# Altium PCB CDH_PCB.PcbDoc
Units mil, origin at the board's own origin, x right, y up, seen from the top; angles counter-clockwise.
Board outline 4735 x 5440 mil, 4 copper layers (Top Layer, Int1 (GND), Int2 (PWR), Bottom Layer), stack 53.912 mil thick; 100 components, 95 nets, 535 pads, 0 vias.
Unrouted connection lines stored in the file: 290.
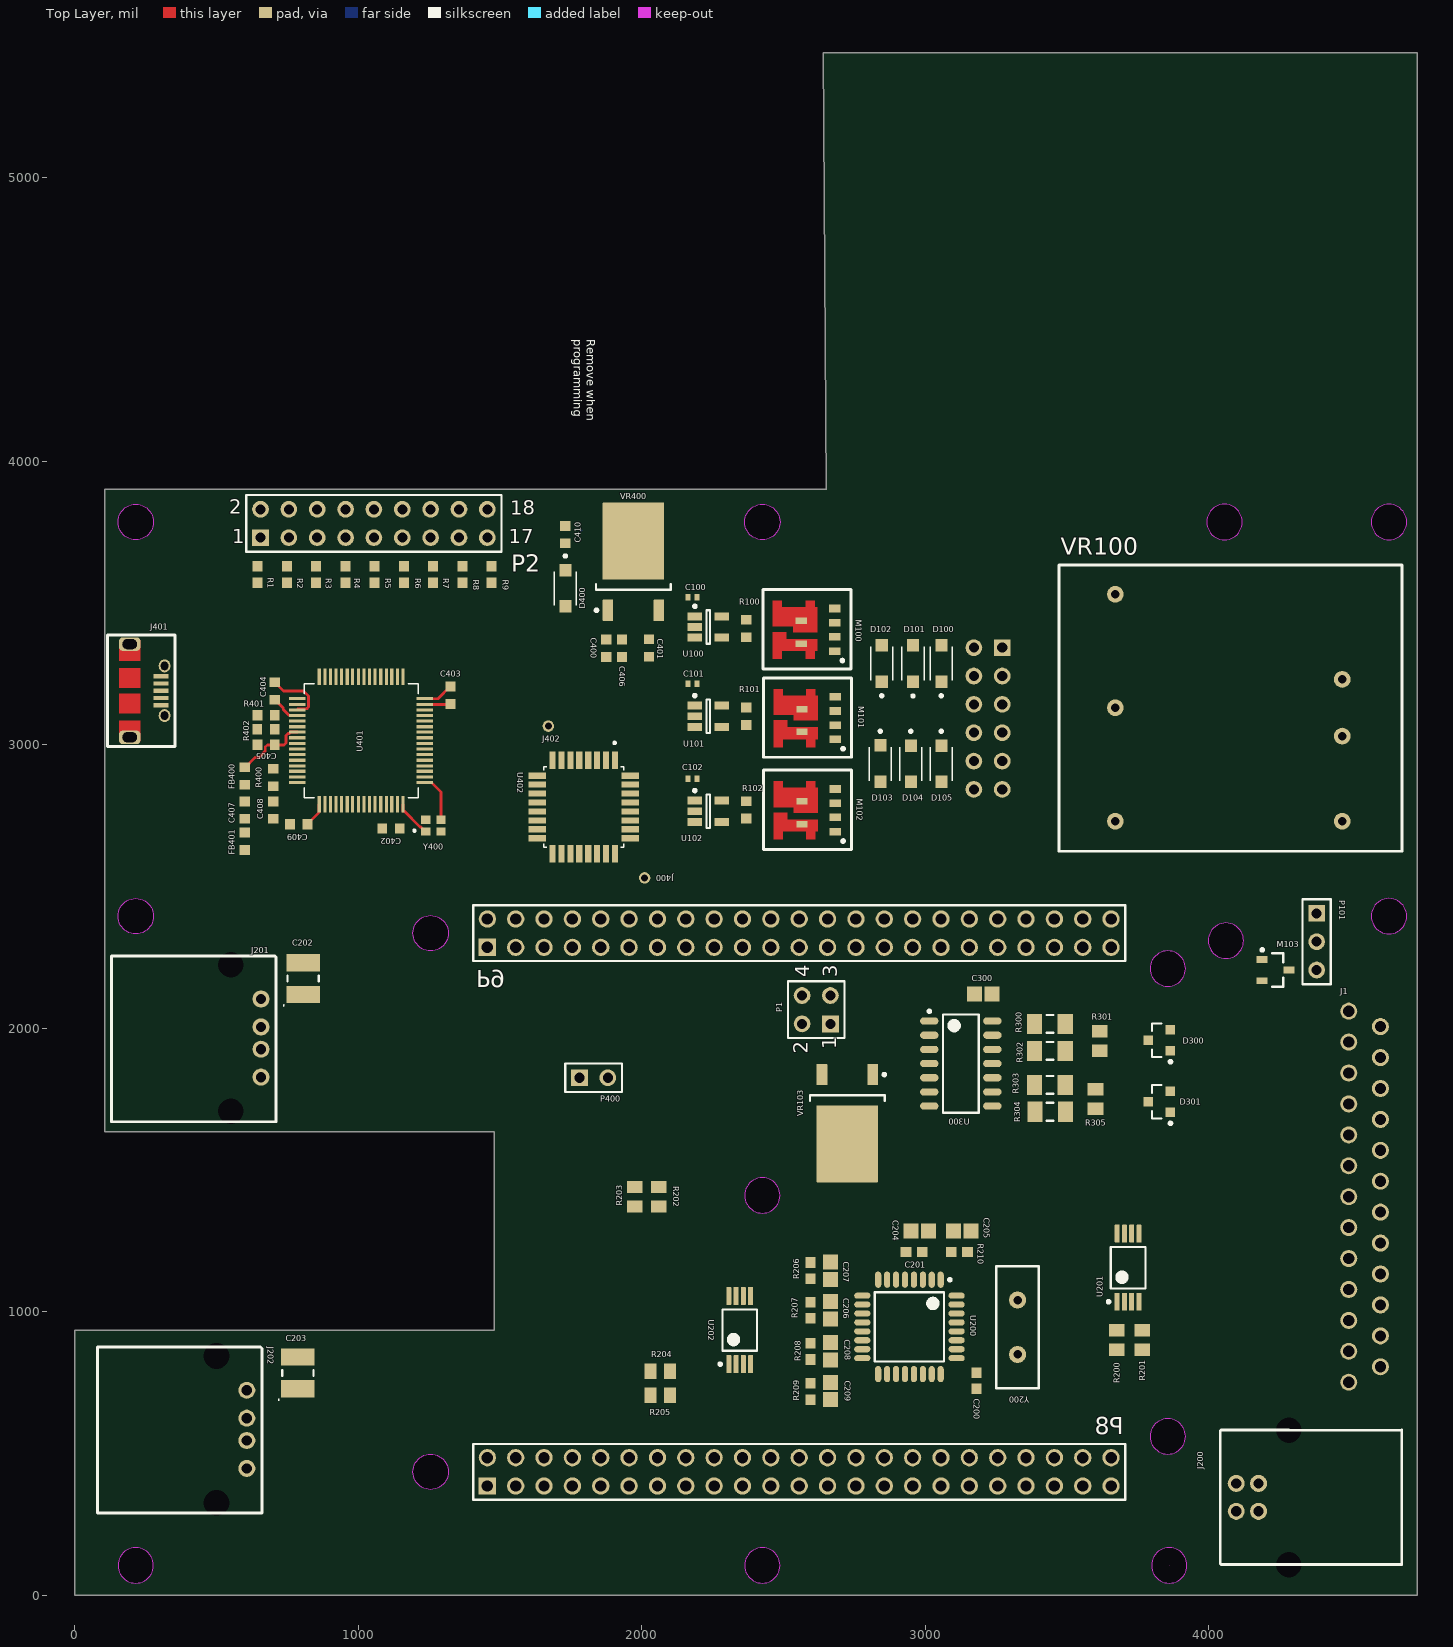
[diagram p0: Top Layer view]
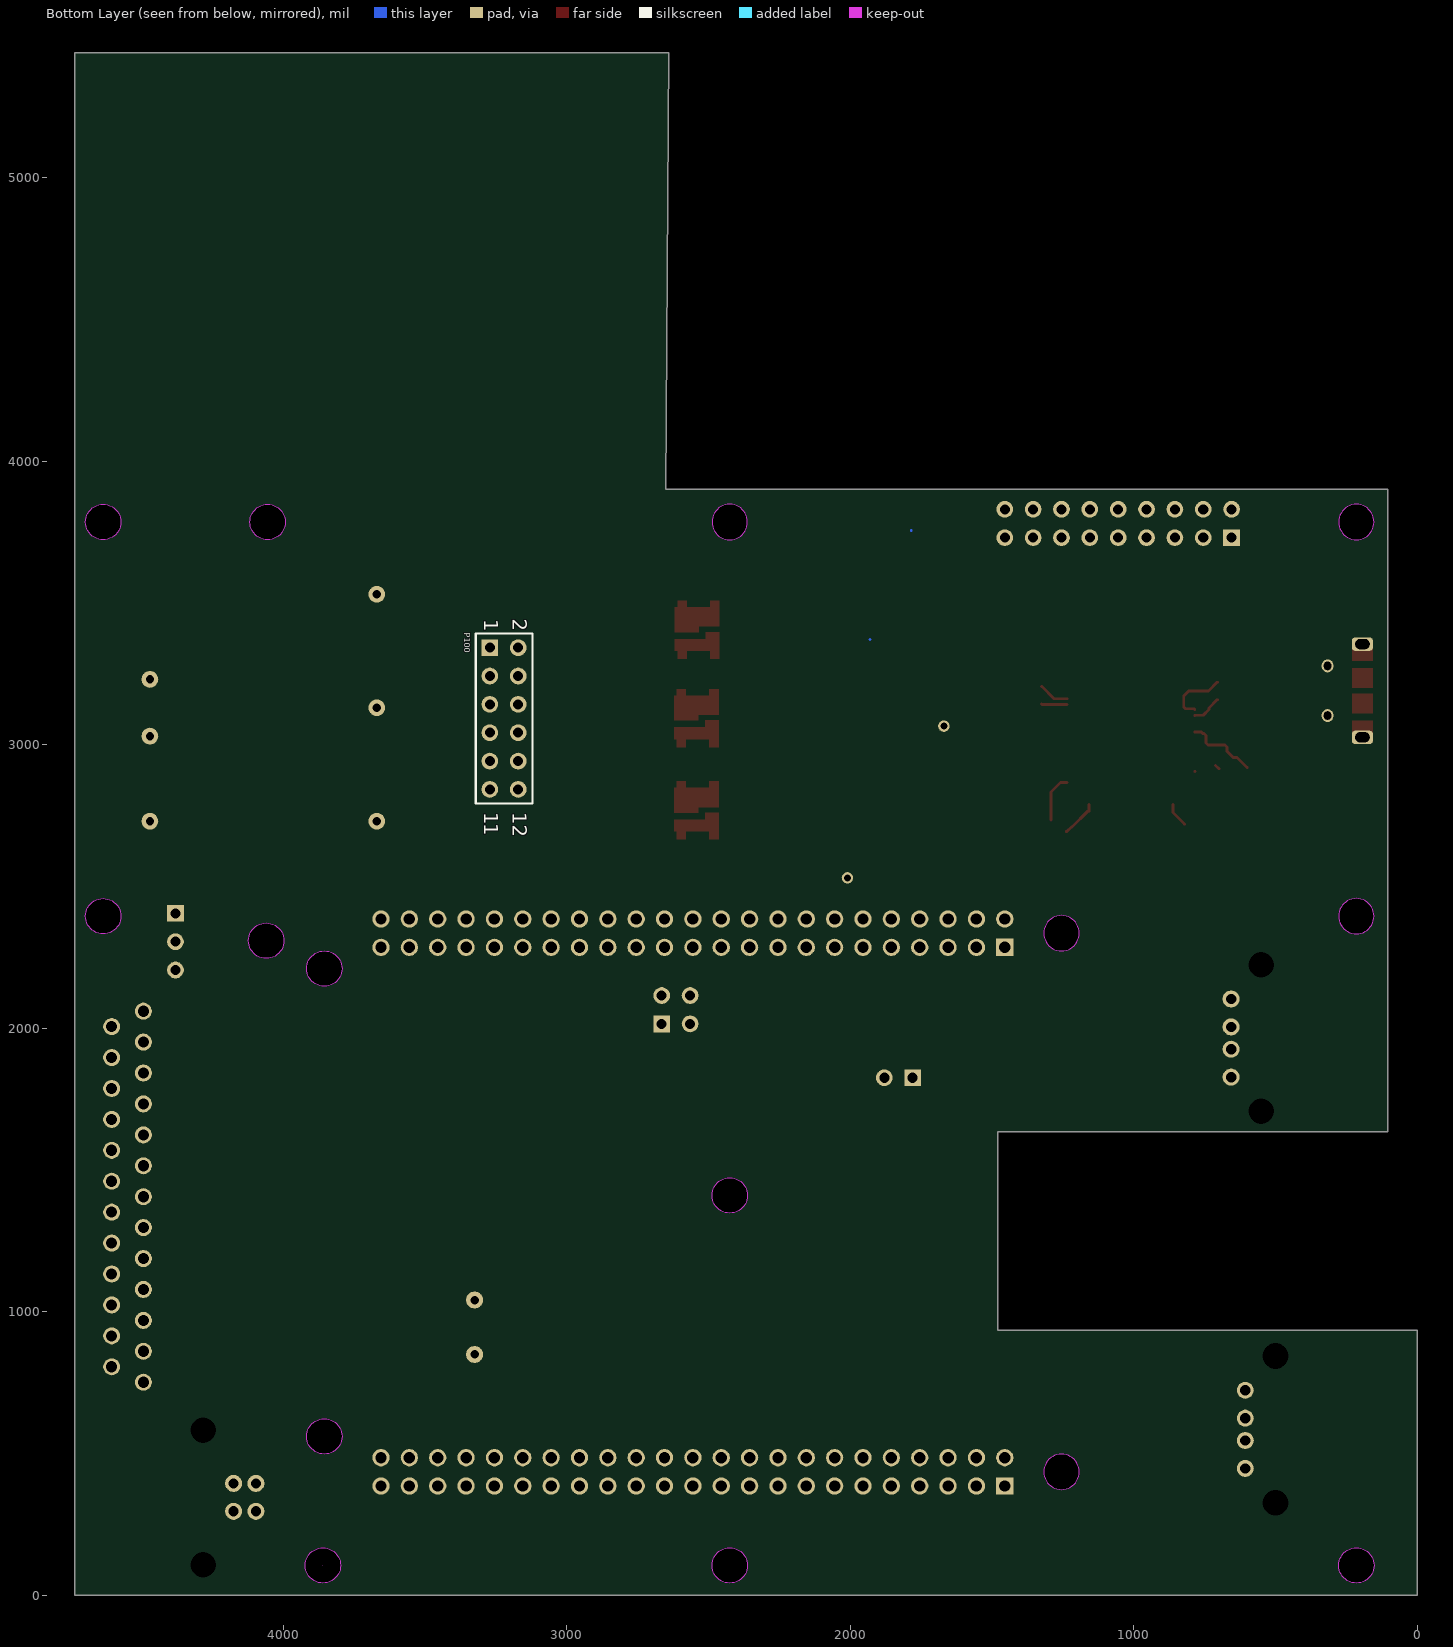
[diagram p1: Bottom Layer view, seen from below]

## Layer stack, top to bottom
Top Solder: solder mask 1, SM-001, Dk 4
Top Layer: signal copper 1.378
Dielectric 1: prepreg 5.1, PP-017, Dk 4.3
Dielectric 2: prepreg 5.1, PP-017, Dk 4.3
Int1 (GND): signal copper 1.378
Dielectric 3: core 28, Core-039, Dk 4.8
Int2 (PWR): signal copper 1.378
Dielectric 4: prepreg 5.1, PP-017, Dk 4.3
Dielectric 5: prepreg 5.1, PP-017, Dk 4.3
Bottom Layer: signal copper 1.378
Bottom Solder: solder mask 1, SM-001, Dk 4

## Board outline
0,0 0,935 1480,935 1480,1635 105,1635 105,3900 2649.97,3900 2650,3900.03 2640,5440 4735,5440 4735,3900 4735,0
cut-out: 1255,2272.5 cw(c1255,2335) 1192.5,2335 cw(c1255,2335) 1255,2397.5 cw(c1255,2335) 1317.5,2335 cw(c1255,2335)
cut-out: 3997.5,2308.5 ccw(c4060,2308.5) 4060,2246 ccw(c4060,2308.5) 4122.5,2308.5 ccw(c4060,2308.5) 4060,2371 ccw(c4060,2308.5)
cut-out: 3992.5,3785 ccw(c4055,3785) 4055,3722.5 ccw(c4055,3785) 4117.5,3785 ccw(c4055,3785) 4055,3847.5 ccw(c4055,3785)
cut-out: 3792.5,560 ccw(c3855,560) 3855,497.5 ccw(c3855,560) 3917.5,560 ccw(c3855,560) 3855,622.5 ccw(c3855,560)
cut-out: 3792.5,2210 ccw(c3855,2210) 3855,2147.5 ccw(c3855,2210) 3917.5,2210 ccw(c3855,2210) 3855,2272.5 ccw(c3855,2210)
cut-out: 1192.5,435 cw(c1255,435) 1255,497.5 cw(c1255,435) 1317.5,435 cw(c1255,435) 1255,372.5 cw(c1255,435)
cut-out: 215,3722.5 cw(c215,3785) 152.5,3785 cw(c215,3785) 215,3847.5 cw(c215,3785) 277.5,3785 cw(c215,3785)
cut-out: 215,2332.5 cw(c215,2395) 152.5,2395 cw(c215,2395) 215,2457.5 cw(c215,2395) 277.5,2395 cw(c215,2395)
cut-out: 2362.5,1410 ccw(c2425,1410) 2425,1347.5 ccw(c2425,1410) 2487.5,1410 ccw(c2425,1410) 2425,1472.5 ccw(c2425,1410)
cut-out: 3797.5,105 ccw(c3860,105) 3860,42.5 ccw(c3860,105) 3922.5,105 ccw(c3860,105) 3860,167.5 ccw(c3860,105)
cut-out: 2362.5,105 ccw(c2425,105) 2425,42.5 ccw(c2425,105) 2487.5,105 ccw(c2425,105) 2425,167.5 ccw(c2425,105)
cut-out: 215,3722.5 cw(c215,3785) 152.5,3785 cw(c215,3785) 215,3847.5 cw(c215,3785) 277.5,3785 cw(c215,3785)
cut-out: 2425,3722.5 cw(c2425,3785) 2362.5,3785 cw(c2425,3785) 2425,3847.5 cw(c2425,3785) 2487.5,3785 cw(c2425,3785)
cut-out: 4572.5,3785 ccw(c4635,3785) 4635,3722.5 ccw(c4635,3785) 4697.5,3785 ccw(c4635,3785) 4635,3847.5 ccw(c4635,3785)
cut-out: 4572.5,2395 ccw(c4635,2395) 4635,2332.5 ccw(c4635,2395) 4697.5,2395 ccw(c4635,2395) 4635,2457.5 ccw(c4635,2395)
cut-out: 152.5,105 ccw(c215,105) 215,42.5 ccw(c215,105) 277.5,105 ccw(c215,105) 215,167.5 ccw(c215,105)
cut-out: 4635,2457.5
cut-out: 3860,105

## Design rules (kind name [scope] priority, off if disabled: settings)
Clearance [All] p1: gap=10 ignorepadtopadclearanceinfootprint=FALSE except(0: Arc-Hole Track-Hole SMDPad-Hole THPad-Hole Via-Hole Fill-Hole Poly-Hole Region-Hole Text-Hole; 5: Arc-SMDPad Track-SMDPad SMDPad-THPad THPad-Fill THPad-Poly THPad-Region; 7: SMDPad-SMDPad)
DiffPairsRouting [All] p1: maxlimit=10 minlimit=10 mostfreqgap=10 toplayer_minwidth=15 toplayer_maxwidth=15 toplayer_prefwidth=15 midlayer1_minwidth=15 midlayer1_maxwidth=15 midlayer1_prefwidth=15 midlayer2_minwidth=15 midlayer2_maxwidth=15 midlayer2_prefwidth=15 bottomlayer_minwidth=15 bottomlayer_maxwidth=15 bottomlayer_prefwidth=15 maxuncoupledlength=500
Height [All] p1: minheight=0 maxheight=1500 prefheight=500
MatchedLengths MatchedLengths_USB_DiffPairs [All] p1: tolerance=5 checknetsindiffpair=TRUE checkdiffpairvsdiffpair=FALSE checkxsignals=FALSE checkothers=FALSE
MaxMinImpedance "Schematic Impedance Constraint_11" [InNet('RS422-Rx_P')] p1: minimum=90.00 maximum=110.0
MaxMinImpedance "Schematic Impedance Constraint_10" [InNet('RS422-Rx_N')] p2: minimum=90.00 maximum=110.0
MaxMinImpedance "Schematic Impedance Constraint_9" [InNet('RS422-Tx_P')] p3: minimum=90.00 maximum=110.0
MaxMinImpedance "Schematic Impedance Constraint_8" [InNet('RS422-Tx_N')] p4: minimum=90.00 maximum=110.0
MaxMinImpedance "Schematic Impedance Constraint_7" [InNet('USB_1_P')] p5: minimum=40.50 maximum=49.50
MaxMinImpedance "Schematic Impedance Constraint_6" [InNet('USB_1_N')] p6: minimum=40.50 maximum=49.50
MaxMinImpedance "Schematic Impedance Constraint_5" [InNet('USB_2_P')] p7: minimum=40.50 maximum=49.50
MaxMinImpedance "Schematic Impedance Constraint_4" [InNet('USB_0_N')] p8: minimum=40.50 maximum=49.50
MaxMinImpedance "Schematic Impedance Constraint_3" [InNet('TEENSY_USB_P')] p9: minimum=40.50 maximum=49.50
MaxMinImpedance "Schematic Impedance Constraint_2" [InNet('TEENSY_USB_N')] p10: minimum=40.50 maximum=49.50
MaxMinImpedance "Schematic Impedance Constraint_1" [InNet('USB_2_N')] p11: minimum=40.50 maximum=49.50
MaxMinImpedance "Schematic Impedance Constraint" [InNet('USB_0_P')] p12: minimum=40.50 maximum=49.50
PolygonConnect [All] p1: connectstyle=Relief reliefconductorwidth=10 reliefentries=4 polygonreliefangle="90 Angle" airgapwidth=10
RoutingVias [All] p1: holewidth=28 width=50 viastyle="Through Hole" minholewidth=28 minwidth=50 maxholewidth=28 maxwidth=50
SolderMaskExpansion [All] p1: expansion=4 istentingtop=FALSE
Width [All] p1: maxlimit=10 minlimit=10 preferedwidth=10
28 further rules are at their usual default settings.

## Classes and differential pairs
net class 400_TEENSY_Nets: +5 GND_TN NetC400_1 NetC401_1 NetC407_1 NetC407_2 NetC408_1 NetC409_2 NetC410_1 NetJ1_20 NetJ1_21 NetJ1_22 NetJ1_23 NetJ1_24 NetJ400_1 NetJ401_4 NetJ402_1 NetP2_1 NetP2_3 NetP2_5 NetP2_7 NetP2_9 NetP2_11 NetP2_13 NetP2_15 NetP2_17 NetP9_21 NetP9_22 NetR401_1 NetR402_1 NetU100_3 NetU101_3 NetU102_3 NetU401_22 NetU401_24 NetU401_25 NetU401_32 NetU401_33 TEENSY_USB_N TEENSY_USB_P
net class 300_CDH_RS422_Nets: 3V3 GND NetP1_2 NetP1_4 NetR300_1 NetR302_1 NetR303_1 NetR304_1 RS422-Rx_N RS422-Rx_P RS422-Tx_N RS422-Tx_P
net class 200_CDH_USB_2_Hub_Nets: 3V3 +5_USB GND GNDUSB NetC204_1 NetC205_1 NetC206_1 NetC207_1 NetC208_2 NetC209_2 NetP9_12 NetU200_29 NetU200_30 USB_0_N USB_0_P USB_1_N USB_1_P USB_2_N USB_2_P
net class 100_POWER_Nets: 3V3 +5 +28 GND GND_5V NetD100_2 NetD101_2 NetD102_2 NetD103_2 NetD104_2 NetD105_2 NetM100_3 NetM101_3 NetM102_3 NetM103_1 NetM103_3 NetR100_1 NetR101_1 NetR102_1 NetU100_3 NetU101_3 NetU102_3
net class 000_BBB_Pinouts_Nets: +5 +28 GND NetC407_1 NetC407_2 NetJ1_1 NetJ1_4 NetJ1_13 NetJ1_14 NetJ1_15 NetJ1_16 NetJ1_17 NetJ1_20 NetJ1_21 NetJ1_22 NetJ1_23 NetJ1_24 NetM103_1 NetP1_1 NetP1_2 NetP1_3 NetP1_4 NetP2_1 NetP2_3 NetP2_5 NetP2_7 NetP2_9 NetP2_11 NetP2_13 NetP2_15 NetP2_17 NetP9_10 NetP9_12 NetP9_21 NetP9_22 RS422-Rx_N RS422-Rx_P RS422-Tx_N RS422-Tx_P
component class 400_TEENSY: C400 C401 C402 C403 C404 C405 C406 C407 C408 C409 C410 D400 FB400 FB401 J400 J401 J402 P400 R400 R401 R402 U401 U402 VR400 Y400
component class 100_POWER: C100 C101 C102 D100 D101 D102 D103 D104 D105 M100 M101 M102 M103 P100 P101 R100 R101 R102 U100 U101 U102 VR100 VR103
component class 300_CDH_RS422: * C300 D300 D301 R300 R301 R302 R303 R304 R305 U300
component class 200_CDH_USB_2_Hub: C200 C201 C202 C203 C204 C205 C206 C207 C208 C209 J200 J201 J202 R200 R201 R202 R203 R204 R205 R206 R207 R208 R209 R210 U200 U201 U202 Y200
component class 000_BBB_Pinouts: J1 P1 P2 P8 P9 R1 R2 R3 R4 R5 R6 R7 R8 R9
differential pair USB_0: +USB_0_P -USB_0_N
differential pair USB_2: +USB_2_P -USB_2_N
differential pair USB_1: +USB_1_P -USB_1_N
differential pair TEENSY_USB: +TEENSY_USB_P -TEENSY_USB_N
differential pair RS422-Tx: +RS422-Tx_P -RS422-Tx_N
differential pair RS422-Rx: +RS422-Rx_P -RS422-Rx_N

## Components (designator, comment, footprint, x,y, rotation, side; value= is the part's Value field where it differs from the comment)
C100 "C2012X8L1A106K125AE" *INDC0805X55N 2178.19,3520 r0 top value=10uF
C101 "C2012X8L1A106K125AE" *INDC0805X55N 2178.19,3215 r0 top value=10uF
C102 "C2012X8L1A106K125AE" *INDC0805X55N 2178.19,2880 r0 top value=10uF
C200 "C0603C101K8HAUTO" R_Imperial0603 3180,756.46 r90 top value=100pF
C201 "C0603C101K8HAUTO" R_Imperial0603 2960,1210 r180 top value=100pF
C202 "F910J107MBAAJ6" POLAR_CAP_SMD_EIA2010 805,2175 r90 top value=100uF
C203 "F910J107MBAAJ6" POLAR_CAP_SMD_EIA2010 786.46,783.9 r90 top value=100uF
C204 "C0805X220K3GACAUTO" Cap_EIA0805 2980,1285 r180 top value=22pF
C205 "C0805X220K3GACAUTO" Cap_EIA0805 3130,1285 r0 top value=22pF
C206 "C0805X220K3GACAUTO" Cap_EIA0805 2665,1005 r270 top value=22pF
C207 "C0805X220K3GACAUTO" Cap_EIA0805 2665,1144.49 r90 top value=22pF
C208 "C0805X220K3GACAUTO" Cap_EIA0805 2665,860.31 r270 top value=22pF
C209 "C0805X220K3GACAUTO" Cap_EIA0805 2665,720.31 r90 top value=22pF
C300 "GCM219R71C204JA37J" Cap_EIA0805 3204.49,2120 r180 top value=0.2uF
C400 "smtcap_np" *RESC1608X55N 1875,3340 r90 top value=2.2uF
C401 "smtcap_np" *RESC1608X55N 2025,3340.71 r270 top value=2.2uF
C402 "smtcap_np" *RESC1608X55N 1115,2704 r0 top value=2.2uF
C403 "smtcap_np" *RESC1608X55N 1325,3174 r270 top value=0.1uF
C404 "smtcap_np" *RESC1608X55N 705,3189 r270 top value=0.1uF
C405 "smtcap_np" *RESC1608X55N 675,2999 r180 top value=0.1uF
C406 "smtcap_np" *RESC1608X55N 1930,3340 r90 top value=2.2uF
C407 "smtcap_np" *RESC1608X55N 600,2769 r270 top value=2.2uF
C408 "smtcap_np" *RESC1608X55N 700,2769 r90 top value=0.1uF
C409 "smtcap_np" *RESC1608X55N 790,2719 r0 top value=0.1uF
C410 "smtcap_np" *RESC1608X55N 1730,3740.71 r90 top value=0.1uF
D100 "Schottky Diode" *SODFL3718X108N 3056.06,3286.93 r90 top
D101 "Schottky Diode" *SODFL3718X108N 2956.06,3286.69 r90 top
D102 "Schottky Diode" *SODFL3718X108N 2846.06,3286.93 r90 top
D103 "Schottky Diode" *SODFL3718X108N 2841.06,2932.17 r270 top
D104 "Schottky Diode" *SODFL3718X108N 2948.56,2931.93 r270 top
D105 "Schottky Diode" *SODFL3718X108N 3056.06,2931.93 r270 top
D300 "CDSOT23-SM712" BOUR-SOT23-3_V 3825,1957.4 r180 top
D301 "CDSOT23-SM712" BOUR-SOT23-3_V 3825,1740 r180 top
D400 "Schottky Diode" *SODFL3718X108N 1730,3550.24 r270 top
FB400 "FERRITE" *RESC1608X55N 600,2889 r270 top
FB401 "FERRITE" *RESC1608X55N 600,2659 r90 top
J1 "DB-25 Socket for Rover connection" DB-25_Standard_Density 4627.83,361.38 r90 top
J200 "USB_B_FEMALE" USB_B_FEMALE_RT 4175,345 r90 top
J201 "USB_A_FEMALE" USB_A_FEMALE_SINGLE 550,1965 r270 top
J202 "USB_A_FEMALE" USB_A_FEMALE_SINGLE 500,585 r270 top
J400 "Prog. Pad" PAD_40x25 2010,2530 r180 top value=DNI
J401 "uUSB Padsonly" uUSB_Padsonly 90,3390 r270 top value=DNI
J402 "Reset Pad" PAD_40x25 1670,3065 r90 top value=DNI
M100 "NPN MOSFET" "PowerPAK SO-8L DUAL ASYMMETRIC" 2737.28,3266.61 r90 top
M101 "NPN MOSFET" "PowerPAK SO-8L DUAL ASYMMETRIC" 2739.61,2955.24 r90 top
M102 "NPN MOSFET" "PowerPAK SO-8L DUAL ASYMMETRIC" 2739.61,2629.92 r90 top
M103 "BSS138LT7G" SOT95P245X110-3N 4235,2205 r0 top
P1 "Header 2X2" HDR2X2 2665,2015 r90 top
P2 "Connections to Thermisters" HDR2X9 655,3730 r0 top
P8 "FEMALE HEADER 2x23" MAJOR-TSHC-123-D-03_V 2555,435 r0 top locked
P9 "FEMALE HEADER 2x23" MAJOR-TSHC-123-D-03_V 2555,2335 r0 top locked
P100 "Header 6X2" HDR2X6 3271.06,3341.93 r270 bottom
P101 "48V Regulator Connector" HDR1X3 4380,2405 r270 top
P400 "Header 2" HDR1X2 1780,1825 r0 top
R1 "RN731JTTD1002F10" R_Imperial0603 645,3600 r90 top value=10K
R2 "RN731JTTD1002F10" R_Imperial0603 748.12,3600 r90 top value=10K
R3 "RN731JTTD1002F10" R_Imperial0603 851.25,3600 r90 top value=10K
R4 "RN731JTTD1002F10" R_Imperial0603 954.38,3600 r90 top value=10K
R5 "RN731JTTD1002F10" R_Imperial0603 1057.5,3600 r90 top value=10K
R6 "RN731JTTD1002F10" R_Imperial0603 1160.62,3600 r90 top value=10K
R7 "RN731JTTD1002F10" R_Imperial0603 1263.75,3600 r90 top value=10K
R8 "RN731JTTD1002F10" R_Imperial0603 1366.88,3600 r90 top value=10K
R9 "RN731JTTD1002F10" R_Imperial0603 1470,3600 r90 top value=10K
R100 "CRCW0603100RFKEAC" *RESC1608X55N 2368.19,3409.29 r90 top value=100
R101 "CRCW0603100RFKEAC" *RESC1608X55N 2368.19,3100 r90 top value=100
R102 "CRCW0603100RFKEAC" *RESC1608X55N 2368.19,2770 r90 top value=100
R200 "CR0805-FX-27R0ELF" RESC2012X06N 3675,900 r90 top value=27
R201 "CR0805-FX-27R0ELF" RESC2012X06N 3765,900 r90 top value=27
R202 "CR0805-FX-27R0ELF" RESC2012X06N 2060,1405 r90 top value=27
R203 "CR0805-FX-27R0ELF" RESC2012X06N 1975,1405 r90 top value=27
R204 "CR0805-FX-27R0ELF" RESC2012X06N 2065,790 r180 top value=27
R205 "CR0805-FX-27R0ELF" RESC2012X06N 2065,705 r180 top value=27
R206 "CRCW060315K0JNEAC" R_Imperial0603 2595,1145 r90 top value=15K
R207 "CRCW060315K0JNEAC" R_Imperial0603 2595,1005 r270 top value=15K
R208 "CRCW060315K0JNEAC" R_Imperial0603 2595,860 r270 top value=15K
R209 "CRCW060315K0JNEAC" R_Imperial0603 2595,718.54 r90 top value=15K
R210 "ERJ-S03D1501V" R_Imperial0603 3120,1210 r0 top value=1.5K
R300 "SR732BTTE10R0F" RESC3216X07N 3439.13,2015 r0 top value=10
R301 "SR0805FR-47100RL" RESC2012X06N 3615,1955 r270 top value=100
R302 "SR732BTTE10R0F" RESC3216X07N 3439.13,1920 r0 top value=10
R303 "SR732BTTE10R0F" RESC3216X07N 3439.13,1800 r0 top value=10
R304 "SR732BTTE10R0F" RESC3216X07N 3440,1705 r0 top value=10
R305 "SR0805FR-47100RL" RESC2012X06N 3600,1750 r90 top value=100
R400 "smtres" *RESC1608X55N 700,2884 r90 top value=470
R401 "smtres" *RESC1608X55N 675,3104 r180 top value=33
R402 "smtres" *RESC1608X55N 674.29,3054 r180 top value=33
U100 "LTC1981ES5#TRMPBF" LT-S5-5-SOT-23_M 2234.09,3415 r0 top
U101 "LTC1981ES5#TRMPBF" LT-S5-5-SOT-23_M 2234.09,3100 r0 top
U102 "LTC1981ES5#TRMPBF" LT-S5-5-SOT-23_M 2234.09,2765 r0 top
U200 "TUSB2046B_VF_32" TQFP80P900X900X160-32N 2943.74,946.34 r270 top value=Value
U201 "SN65240PWR" PW0008A_M 3715,1155 r90 top
U202 "SN65240PWR" PW0008A_M 2345,935 r90 top
U300 "SN65HVD1470D" SOIC127P590X175-14M 3125,1875 r0 top
U401 "MK20DX256VLH7" *QFP50P1200X1200X160-64N 1010,3014 r0 top
U402 "MKL04Z32" *QFP80P900X900X160-32N 1795,2780 r270 top
VR100 "THN 30-2411WI-A1" "THN 30-2411WI-A1" 3471.57,3633.66 r270 top
VR103 "LP38691DT-3.3/NOPB" NDP0003B_N 2725,1665 r270 top
VR400 "LP38691DT-3.3/NOPB" NDP0003B_N 1970,3645 r90 top
Y200 "ATS060C-E" "HC-49/US T/H Crystal" 3325,945 r270 top
Y400 "ECS-160-10-37-RWM-TR" XTAL_ECS-160-10-37-RWM-TR 1265,2714 r0 top

## Footprints (in the part's own frame and the unit in brackets; to place one, negate y for a bottom-side part, rotate by r counter-clockwise, add the part's x,y. Pads: shape width x height; smd on the part's side, far side on the other; paste and mask are expansions set on the pad)
*INDC0805X55N [mm]
  rect 0.44x0.6 smd: 1(-0.405,0) 2(0.405,0)
  body extent -0.45,-0.28 0.45,0.28, height 1.1
*QFP50P1200X1200X160-64N [mil]
  rect 58x11 smd: 1(-225,148) 2(-225,128) 3(-225,108) 4(-225,89) 5(-225,69) 6(-225,49) 7(-225,30) 8(-225,10) 9(-225,-10) 10(-225,-30) 11(-225,-49) 12(-225,-69) 13(-225,-89) 14(-225,-108) 15(-225,-128) 16(-225,-148) 33(225,-148) 34(225,-128) 35(225,-108) 36(225,-89) 37(225,-69) 38(225,-49) 39(225,-30) 40(225,-10) 41(225,10) 42(225,30) 43(225,49) 44(225,69) 45(225,89) 46(225,108) 47(225,128) 48(225,148)
  rect 11x58 smd: 17(-148,-225) 18(-128,-225) 19(-108,-225) 20(-89,-225) 21(-69,-225) 22(-49,-225) 23(-30,-225) 24(-10,-225) 25(10,-225) 26(30,-225) 27(49,-225) 28(69,-225) 29(89,-225) 30(108,-225) 31(128,-225) 32(148,-225) 49(148,225) 50(128,225) 51(108,225) 52(89,225) 53(69,225) 54(49,225) 55(30,225) 56(10,225) 57(-10,225) 58(-30,225) 59(-49,225) 60(-69,225) 61(-89,225) 62(-108,225) 63(-128,225) 64(-148,225)
  silkscreen extent -201,-201 201,201, body extent -239,-240 239,238, height 64
*QFP80P900X900X160-32N [mm]
  rect 1.56x0.55 smd: 1(-4.18,2.8) 2(-4.18,2) 3(-4.18,1.2) 4(-4.18,0.4) 5(-4.18,-0.4) 6(-4.18,-1.2) 7(-4.18,-2) 8(-4.18,-2.8) 17(4.18,-2.8) 18(4.18,-2) 19(4.18,-1.2) 20(4.18,-0.4) 21(4.18,0.4) 22(4.18,1.2) 23(4.18,2) 24(4.18,2.8)
  rect 0.55x1.56 smd: 9(-2.8,-4.18) 10(-2,-4.18) 11(-1.2,-4.18) 12(-0.4,-4.18) 13(0.4,-4.18) 14(1.2,-4.18) 15(2,-4.18) 16(2.8,-4.18) 25(2.8,4.18) 26(2,4.18) 27(1.2,4.18) 28(0.4,4.18) 29(-0.4,4.18) 30(-1.2,4.18) 31(-2,4.18) 32(-2.8,4.18)
  silkscreen extent -5.84,-3.6 3.6,3.6, body extent -3.56,-3.56 3.56,3.56, height 0.76
*RESC1608X55N [mm]
  rect 0.87x0.93 smd: 1(-0.78,0) 2(0.78,0)
  body extent -0.89,-0.38 0.89,0.38, height 0.46
*SODFL3718X108N [mm]
  rect 1.12x1.08 smd: A(1.6,0) C(-1.645,0)
  silkscreen extent -3.04,-1 1.5,1, body extent -1.52,-1.02 1.52,1.02, height 0.97
BOUR-SOT23-3_V [mm] "SOT23, 3-Leads, Body 2.9x1.3mm, Pitch 0.95mm"
  rect 0.85x0.85 smd: 1(-1,0.95) 2(-1,-0.95) 3(1,0)
  silkscreen extent -1.13,-1.5 0.65,2.05, body extent -0.65,-1.45 0.65,1.45, height 1.17
Cap_EIA0805 [mm] "Chip Capacitor, 2-Leads, Body 2.00x1.23mm, IPC Medium Density"
  rect 1.35x1.35 smd: 1(-0.775,0) 2(0.775,0)
  body extent -1.1,-0.65 1.1,0.65, height 0.85
DB-25_Standard_Density [mm] "Right angle DB-25 standard density connector"
  round 1.524 hole 1: 1(43.14,3.42) 2(40.37,3.42) 3(37.6,3.42) 4(34.83,3.42) 5(32.06,3.42) 6(29.29,3.42) 7(26.52,3.42) 8(23.75,3.42) 9(20.98,3.42) 10(18.21,3.42) 11(15.44,3.42) 12(12.67,3.42) 13(9.9,3.42) 14(41.755,0.58) 15(38.985,0.58) 16(36.215,0.58) 17(33.445,0.58) 18(30.675,0.58) 19(27.905,0.58) 20(25.135,0.58) 21(22.365,0.58) 22(19.595,0.58) 23(16.825,0.58) 24(14.055,0.58) 25(11.285,0.58)
"HC-49/US T/H Crystal" [mil]
  round 60 hole 30: 1(-96.06,0) 2(96.06,0)
  silkscreen extent -215,-75 215,75, body extent -218,-92 218,92, height 161
HDR1X2 [mm] "Connector; Header; 2 Position"
  rect 1.5x1.5 hole 0.9: 1(0,0)
  round 1.5 hole 0.9: 2(2.54,0)
  silkscreen extent -1.27,-1.27 3.81,1.27
HDR1X3 [mm] "Connector; Header; 3 Position"
  rect 1.5x1.5 hole 0.9: 1(0,0)
  round 1.5 hole 0.9: 2(2.54,0) 3(5.08,0)
  silkscreen extent -1.27,-1.27 6.35,1.27
HDR2X2 [mm] "Connector; Header; 2x2 Position"
  rect 1.5x1.5 hole 0.9: 1(0,0)
  round 1.5 hole 0.9: 2(0,2.54) 3(2.54,0) 4(2.54,2.54)
  silkscreen extent -1.27,-1.27 3.81,3.81
HDR2X6 [mm] "Connector; Header; 6x2 Position"
  rect 1.5x1.5 hole 0.9: 1(0,0)
  round 1.5 hole 0.9: 2(0,2.54) 3(2.54,0) 4(2.54,2.54) 5(5.08,0) 6(5.08,2.54) 7(7.62,0) 8(7.62,2.54) 9(10.16,0) 10(10.16,2.54) 11(12.7,0) 12(12.7,2.54)
  silkscreen extent -1.27,-1.27 13.97,3.81
HDR2X9 [mm] "Connector; Header; 9x2 Position"
  rect 1.5x1.5 hole 0.9: 1(0,0)
  round 1.5 hole 0.9: 2(0,2.54) 3(2.54,0) 4(2.54,2.54) 5(5.08,0) 6(5.08,2.54) 7(7.62,0) 8(7.62,2.54) 9(10.16,0) 10(10.16,2.54) 11(12.7,0) 12(12.7,2.54) 13(15.24,0) 14(15.24,2.54) 15(17.78,0) 16(17.78,2.54) 17(20.32,0) 18(20.32,2.54)
  silkscreen extent -1.27,-1.27 21.59,3.81
LT-S5-5-SOT-23_M [mm] "SOT23, 5-Leads, Body 3x1.75mm, Pitch 0.95mm, IPC Low Density"
  rect 1.3x0.7 smd: 1(-1.2,0.95) 2(-1.2,0) 3(-1.2,-0.95) 4(1.2,-0.95) 5(1.2,0.95)
  silkscreen extent -1.32,-1.5 0.15,1.97, body extent -0.87,-1.5 0.87,1.5, height 1.45
MAJOR-TSHC-123-D-03_V [mm] "CONN, 46-Leads, Body 58.42x5mm, Pitch 2.54mm"
  rect 1.55x1.55 hole 1.02 paste+0: 1(-27.94,-1.27)
  round 1.55 hole 1.02 paste+0: 2(-27.94,1.27) 3(-25.4,-1.27) 4(-25.4,1.27) 5(-22.86,-1.27) 6(-22.86,1.27) 7(-20.32,-1.27) 8(-20.32,1.27) 9(-17.78,-1.27) 10(-17.78,1.27) 11(-15.24,-1.27) 12(-15.24,1.27) 13(-12.7,-1.27) 14(-12.7,1.27) 15(-10.16,-1.27) 16(-10.16,1.27) 17(-7.62,-1.27) 18(-7.62,1.27) 19(-5.08,-1.27) 20(-5.08,1.27) 21(-2.54,-1.27) 22(-2.54,1.27) 23(0,-1.27) 24(0,1.27) 25(2.54,-1.27) 26(2.54,1.27) 27(5.08,-1.27) 28(5.08,1.27) 29(7.62,-1.27) 30(7.62,1.27) 31(10.16,-1.27) 32(10.16,1.27) 33(12.7,-1.27) 34(12.7,1.27) 35(15.24,-1.27) 36(15.24,1.27) 37(17.78,-1.27) 38(17.78,1.27) 39(20.32,-1.27) 40(20.32,1.27) 41(22.86,-1.27) 42(22.86,1.27) 43(25.4,-1.27) 44(25.4,1.27) 45(27.94,-1.27) 46(27.94,1.27)
  silkscreen extent -29.21,-2.5 29.21,2.5, body extent -29.21,-2.5 29.21,2.5, height 8.51
NDP0003B_N [mm] "D-PAK, 4-Leads, Body 6.1x6.6mm, Pitch 2.29mm, Lead Span 9.7mm, IPC Medium Density"
  rrect11% 1.9x0.95 smd: 1(-4.35,2.28) 3(-4.35,-2.28)
  rrect2% 6.9x5.5 smd: 4(1.85,0)
  silkscreen extent -4.47,-3.35 -2,3.43, body extent -2.5,-3.35 3.7,3.35, height 2.38
PAD_40x25 [mil] "Single through-hole solder pad"
  round 40 hole 25: 1(0,0)
POLAR_CAP_SMD_EIA2010 [mm] "Polarized SMT capacitor, Imperial 2010 footprint"
  rect 1.55x3 smd: 1(-1.425,0) 2(1.425,0)
  silkscreen extent -2.46,-1.4 0.25,1.76, body extent -1.85,-1.5 1.85,1.5, height 1.1
"PowerPAK SO-8L DUAL ASYMMETRIC" [mm]
  rect 0.68x1.02 smd: 1(1.61,1.455) 2(2.88,1.455) 3(4.15,1.455) 4(5.42,1.455)
  rect 0.59x1.02 smd paste-1 mask-1: 5(2.28,4.435) 6(4.32,4.435)
  Top Layer region: 4.58,6.35
  Top Layer region: 4.58,5.715
  Top Layer region: 3.81,6.985 6.115,6.985 6.115,6.175 5.53,6.175 5.53,4.065 6.115,4.065 6.115,3.255 5.53,3.255 5.53,3.025 3.3,3.025 3.3,5.165 3.81,5.165
  Top Layer region: 0.915,6.985 3.3,6.985 3.3,5.775 2.685,5.775 2.685,3.025 1.625,3.025 1.625,3.255 0.915,3.255 0.915,4.065 1.625,4.065 1.625,6.175 0.915,6.175
  Top Layer region: 7.874,-1.016
  silkscreen extent 0,0 7.11,7.87, body extent 1.27,1.4 5.71,6.6, height 1.02
PW0008A_M [mm] "SOP, 8-Leads, Body 4.5x3.1mm, Pitch 0.65mm, IPC Low Density"
  rrect22% 1.6x0.45 smd: 1(-3.05,0.975) 2(-3.05,0.325) 3(-3.05,-0.325) 4(-3.05,-0.975) 5(3.05,-0.975) 6(3.05,-0.325) 7(3.05,0.325) 8(3.05,0.975)
  silkscreen extent -3.17,-1.55 1.85,1.87, body extent -3.23,-1.5 3.23,1.5, height 1.2
R_Imperial0603 [mm] "Imperial 0603 resistor footprint"
  rect 0.95x0.9 smd: 1(-0.725,0) 2(0.725,0)
  body extent -0.85,-0.45 0.85,0.45, height 0.55
RESC2012X06N [mm] "Chip Resistor, 2-Leads, Body 2.00x1.25mm, IPC Medium Density"
  rect 1.1x1.4 smd: 1(-0.875,0) 2(0.875,0)
  body extent -1.07,-0.7 1.07,0.7, height 0.6
RESC3216X07N [mm] "Chip Resistor, 2-Leads, Body 3.20x1.60mm, IPC Medium Density"
  rect 1.35x1.8 smd: 1(-1.375,0) 2(1.375,0)
  silkscreen extent -0.3,-0.8 0.3,0.8, body extent -1.7,-0.9 1.7,0.9, height 0.7
SOIC127P590X175-14M [mm] "SOIC, 14-Leads, Body 8.65x3.90mm, Pitch 1.27mm, IPC Low Density"
  oval 1.65x0.65 smd: 1(-2.825,3.81) 2(-2.825,2.54) 3(-2.825,1.27) 4(-2.825,0) 5(-2.825,-1.27) 6(-2.825,-2.54) 7(-2.825,-3.81) 8(2.825,-3.81) 9(2.825,-2.54) 10(2.825,-1.27) 11(2.825,0) 12(2.825,1.27) 13(2.825,2.54) 14(2.825,3.81)
  silkscreen extent -2.95,-4.4 1.6,4.81, body extent -2.95,-4.4 2.95,4.4, height 1.75
SOT95P245X110-3N [mm] "SOT23, 3-Leads, Body 2.92x2.45mm, Pitch 0.95mm, IPC Medium Density"
  rect 1x0.6 smd: 1(-1.2,0.95) 2(-1.2,-0.95) 3(1.2,0)
  silkscreen extent -1.32,-1.5 0.7,1.92, body extent -1.3,-1.52 1.3,1.52, height 1.1
"THN 30-2411WI-A1" [mm]
  round 1.5 hole 0.75 paste+0: 1(10.253,25.36) 2(15.333,25.36) 3(2.633,5.04) 4(12.793,5.04) 5(22.953,5.04) 6(22.953,25.36)
  silkscreen extent 0,0 25.65,30.73, body extent 0.13,0.06 25.53,30.42, height 17.3
TQFP80P900X900X160-32N [mm] "TQFP, 32-Leads, Body 7.00x7.00mm, Pitch 0.80mm, IPC Medium Density"
  oval 1.45x0.55 smd: 1(-4.225,2.8) 2(-4.225,2) 3(-4.225,1.2) 4(-4.225,0.4) 5(-4.225,-0.4) 6(-4.225,-1.2) 7(-4.225,-2) 8(-4.225,-2.8) 17(4.225,-2.8) 18(4.225,-2) 19(4.225,-1.2) 20(4.225,-0.4) 21(4.225,0.4) 22(4.225,1.2) 23(4.225,2) 24(4.225,2.8)
  oval 0.55x1.45 smd: 9(-2.8,-4.225) 10(-2,-4.225) 11(-1.2,-4.225) 12(-0.4,-4.225) 13(0.4,-4.225) 14(1.2,-4.225) 15(2,-4.225) 16(2.8,-4.225) 25(2.8,4.225) 26(2,4.225) 27(1.2,4.225) 28(0.4,4.225) 29(-0.4,4.225) 30(-1.2,4.225) 31(-2,4.225) 32(-2.8,4.225)
  silkscreen extent -4.35,-3.1 3.1,3.75, body extent -4.5,-4.5 4.5,4.5, height 1.6
USB_A_FEMALE_SINGLE [mm] "A horizontally oriented, USB type A receptacle."
  round 1.524 hole 0.92: D+(1,2.71) D-(-1,2.71) GND(3.5,2.71) Vcc(-3.5,2.71)
  round 1.524 hole 2.3 paste+2 mask+0.202: Shield(-6.57,0)
  round 1.524 hole 2.3 mask+0.202: Shield(6.57,0)
  silkscreen extent -7.37,-10.67 7.49,4.06, body extent -7.25,-10.67 7.25,3.85, height 7.12
USB_B_FEMALE_RT [mm] "USB Type B female receptacle, right angle"
  round 1.524 hole 0.92: D+(-1.25,0) D-(-1.25,2) GND(1.25,0) Vcc(1.25,2)
  round 1.524 hole 2.3 mask+0.204: Shield(-6.025,-2.71) Shield(6.025,-2.71)
  silkscreen extent -6.02,-12.83 6.02,3.43, body extent -7.24,-12.89 6.02,3.43, height 10.62
uUSB_Padsonly [mm] "MicroUSB Connection - through hole pads only"
  rect 0.4x1.35 smd paste+0 mask+0.102: 1(3.78,5.421) 2(4.43,5.421) 3(5.087,5.421) 4(5.73,5.421) 5(6.38,5.421)
  rrect50% 1.2x1.9 hole 1.3 slot 0.9 at 0 deg: shield(0.905,2.635) shield(9.255,2.635)
  rrect100% 1.15x1.05 hole 0.65 slot 0.75 at 0 deg paste+0: shield(2.855,5.755)
  rrect100% 1.15x1.05 hole 0.65 slot 0.75 at 0 deg: shield(7.305,5.755)
  Top Layer region: 9.63,3.585 7.73,3.585 7.73,1.685 9.63,1.685
  Top Layer region: 0.53,1.685 2.43,1.685 2.43,3.585 0.53,3.585
  Top Layer region: 3.03,1.685 4.83,1.685 4.83,3.585 3.03,3.585
  Top Layer region: 5.33,1.685 7.13,1.685 7.13,3.585 5.33,3.585
  silkscreen extent 0.08,0.64 10.08,6.68, body extent 1.33,0 8.83,5.59, height 3
XTAL_ECS-160-10-37-RWM-TR [mm]
  rect 0.85x0.75 smd: 1(-0.675,-0.525) 2(0.675,-0.525) 3(0.675,0.525) 4(-0.675,0.525)
  silkscreen extent -1.8,-0.55 -1.6,-0.35, body extent -0.97,-0.8 1.03,0.8, height 0.55

## Part data
C100 C101 C102: "10 uF Capacitor", Supplier Part Number=C2012X8L1A106K125AE
C200 C201: "100pF Cap for IC Vcc Smoothing", Supplier Part Number 1=80-C0603C101K8HAUTO, LatestRevisionDate=29-May-2009, LatestRevisionNote="IPC-7351 Footprint Added.", PackageDescription="Chip Capacitor", PackageReference=C1206, Published=8-Jun-2000, Publisher="Altium Limited", Supplier 1=Mouser
C202 C203: "100uF, USB Power smoothing capacitor, tantalium, low ESR", Supplier Part Number 1=478-12526-1-ND, LatestRevisionDate=29-May-2009, LatestRevisionNote="IPC-7351 Footprint Added.", PackageDescription="Chip Capacitor", PackageReference=C0805, Published=8-Jun-2000, Publisher="Altium Limited", Supplier 1=Digi-Key
C204 C205 C206 C207 C208 C209: "22pF USB Filter Capacitor", Supplier Part Number 1=399-19450-1-ND, LatestRevisionDate=29-May-2009, LatestRevisionNote="IPC-7351 Footprint Added.", PackageDescription="Chip Capacitor", PackageReference=C1206, Published=8-Jun-2000, Publisher="Altium Limited", Supplier 1=Digi-Key
C300: "0.2uF Decoupling Capacitor", Supplier Part Number 1=81-GCM219R71C204JA7J, LatestRevisionDate=29-May-2009, LatestRevisionNote="IPC-7351 Footprint Added.", PackageDescription="Chip Capacitor", PackageReference=C1206, Published=8-Jun-2000, Publisher="Altium Limited", Supplier 1=Mouser
C400 C401 C402 C406 C407: "Non Polarized Chip Cap", Supplier Part Number 1=963-LMK107BJ225KK-T, Supplier 1=Mouser
C403 C404 C405 C408 C409 C410: library part smtcap_np_1, "Non Polarized Chip Cap", Supplier Part Number 1=963-TMK107BJ104KA-T, Supplier 1=Mouser
D100 D101 D102 D103 D104 D105 D400: "1A Schottky Diode", Supplier Part Number 1=511-STPS1L40ZF, Supplier 1=Mouser
D300 D301: "Surface Mount TVS Diode, 17 A Ipp, -55 to 150 degC, 3-Pin SOT23, RoHS, Tape and Reel", Capacitance @ Frequency=75pF@1MHz, Current - Peak Pulse (10/1000µs)=17A(8/20µs), Manufacturer=Bourns, Operating Temperature=-55degC~150degC(TJ), Package / Case=TO-236-3,SC-59,SOT-23-3, Package Description="3-Lead Small Out-Line Transistor, Body 2.9x1.3mm, Pitch 0.95mm", Power - Peak Pulse=400W, Power Line Protection=No, Standard Package=1, Supplier Device Package=SOT-23-3, Voltage - Breakdown (Min)=7.5V,13.3V, Voltage - Clamping (Max) @ Ipp=14V,26V, Voltage - Reverse Standoff (Typ)=7V(Max),12V(Max), Applications=GeneralPurpose, Bidirectional Channels=2, Catalog Drawings=CDSOT23-SM712Schematic, Category=CircuitProtection, Datasheet URL=https://datasheet.ciiva.com/11193/cdsot23-sm712-11193846.pdf, Datasheet Version=Aug-12, Family=TVS-Diodes, For Use With=EVAL-CN0313-SDPZ-ND-EVALEMCRS-485CERTIFIED, Kits=PN-DESIGNKIT-22-ND-KITESD/EFTSURGEPROTECTION, Manufacturer URL=http://www.bourns.com/, Mounting Type=SurfaceMount, Online Catalog=CDSOT23Series, Other Names=CDSOT23-SM712CT, Packaging=CutTape(CT), Product Training Modules=ESDProtectionProducts, Related Products=ADM3485EARZ-REEL7TR-ND-ICTXRXRS-485HS3.3V8SOICADM3485EARZ-REEL7CT-ND-ICTXRXRS-485HS3.3V8SOICADM3485EARZ-REEL7DKR-ND-ICTXRXRS-485HS3.3V8SOICADM3485EARZ-ND-ICTX/RXRS-485HS3.3V8-SOICADM3485EAR-ND-ICTX/RXRS-485HS3.3V8-SOIC296-38503-5-ND-ICTXRXRS4853.3VESD14SOIC296-38501-5-ND-ICRS485TXRX3.3ESD8SOIC296-38522-5-ND-ICTXRXRS4853.3V14SOIC296-38502-5-ND-ICTXRXRS4853.3VESD14SOICADM3485EARZ-REELTR-ND-ICTXRXRS-4853.3V8SOICADM3485EARZ-REELCT-ND-ICTXRXRS-4853.3V8SOICADM3485EARZ-REELDKR-ND-ICTXRXRS-4853.3V8SOIC296-40517-2-ND-ICTXRXRS4853.3V14SOIC296-40517-1-ND-ICTXRXRS4853.3V14SOIC296-40517-6-ND-ICTXRXRS4853.3V14SOIC296-40519-2-ND-ICRS485TXRX3.3ESD8SOIC296-40519-1-ND-ICRS485TXRX3.3ESD8SOIC296-40519-6-ND-ICRS485TXRX3.3ESD8SOIC296-40524-2-ND-ICTXRXRS4853.3VESD8SOIC296-40524-1-ND-ICTXRXRS4853.3VESD8SOIC296-40524-6-ND-ICTXRXRS4853.3VESD8SOIC296-40522-2-ND-ICTXRXRS4853.3VESD14SOIC296-40522-1-ND-ICTXRXRS4853.3VESD14SOIC296-40522-6-ND-ICTXRXRS4853.3VESD14SOIC296-40529-2-ND-ICRS485TXRX3.3ESD8SOIC296-40529-1-ND-ICRS485TXRX3.3ESD8SOIC2, Series=-, Type=Zener, Unidirectional Channels=-
FB400 FB401: library part smt_ferritebead, "Surface Mount Ferrite", Supplier Part Number 1=963-FBMH1608HM601-T, Supplier 1=Mouser
J1: library part L717SDB25PA4CH3R
J200: "USB Type B female connector.", Supplier Part Number 1=380-1492-ND, Supplier 1=Digi-Key, USB Type="Type B"
J201 J202: "USB Type A female connector.", Supplier Part Number 1=732-10012-ND, Supplier 1=Digi-Key, USB Type="Type A"
J400 J402: library part Hole_25mil, "40 mil solder pad - 25 mil hole"
J401: library part uUSB_Padsonly, "Micro USB Connection - solder pads only", Supplier Part Number 1=710-629105150921, Supplier 1=Mouser
M100 M101 M102: library part SQJ208EP-T1_GE3, "Two NPN Power Transistors for heater power control", Supplier Part Number 1=78-SQJ208EP-T1_GE3, Supplier 1=Mouser
M103: "N-MOSFET for logic level switching", Supplier Part Number 1=863-BSS138LT7G, Supplier 1=Mouser
P1: "Header, 2-Pin, Dual row", LatestRevisionDate=17-Jul-2002, LatestRevisionNote="Re-released for DXP Platform.", Publisher="Altium Limited"
P2: library part "Header 9X2", "Header, 9-Pin, Dual row", LatestRevisionDate=17-Jul-2002, LatestRevisionNote="Re-released for DXP Platform.", Publisher="Altium Limited"
P8 P9: library part HDR_46_F_2_0.1_0.1, "CONN HEADER FMAL 46PS.1\" DL GOLD", Color=Black, Manufacturer="Sullins Connector Solutions", Manufacturer Part Number=PPPC232LFBN-RC, Supplier Part Number 1=S7126-ND, Category="Connectors, Interconnects", ComponentLink1Description=http://www.sullinscorp.com/drawings/78_P(N)PxCxxxLFBN-RC,_10492-G.pdf, ComponentLink1URL=http://www.sullinscorp.com/drawings/78_P(N)PxCxxxLFBN-RC,_10492-G.pdf, Connector Type=Header, Contact Finish=Gold, Contact Finish Thickness=Flash, Contact Type="Female Socket", Fastening Type=-, Features=-, Mounting Type="Through Hole", Number of Positions=46, Number of Positions Loaded=All, Number of Rows=2, Packaging=Bulk, Pitch="0.100\" (2.54mm)", Pricing 1="1=2.75, 10=2.325, 25=2.2196, 50=2.0084, 100=1.7969, 250=1.58552, 500=1.4798, 1000=1.3741, 2500=1.32125 (USD)", RoHS="RoHS Compliant", Row Spacing="0.100\" (2.54mm)", Stock 1=750, Supplier 1=Digi-Key, Termination=Solder
P100: "Header, 6-Pin, Dual row", LatestRevisionDate=17-Jul-2002, LatestRevisionNote="Re-released for DXP Platform.", Publisher="Altium Limited"
P101: library part "Header 3", "Header, 3-Pin", LatestRevisionDate=17-Jul-2002, LatestRevisionNote="Re-released for DXP Platform.", Publisher="Altium Limited"
P400: "Header, 2-Pin", LatestRevisionDate=17-Jul-2002, LatestRevisionNote="Re-released for DXP Platform.", Publisher="Altium Limited"
R1 R2 R3 R4 R5 R6 R7 R8 R9: "Thermister Pullup Resistor", Supplier Part Number 1=660-RN731JTTD1002F10, LatestRevisionDate=29-May-2009, LatestRevisionNote="IPC-7351 Footprint Added.", PackageDescription="Chip Resistor", PackageReference=J1-0603, Published=8-Jun-2000, Publisher="Altium Limited", Supplier 1=Mouser
R100 R101 R102: "100 Ohm Resistor", Supplier Part Number 1=541-100HCT-ND, Supplier 1=Digi-Key
R200 R201 R202 R203 R204 R205: "USB Terminating Resistor, 27Ohm", Supplier Part Number 1=652-CR0805FX-27R0ELF, LatestRevisionDate=29-May-2009, LatestRevisionNote="IPC-7351 Footprint Added.", PackageDescription="Chip Resistor", PackageReference=J1-0603, Published=8-Jun-2000, Publisher="Altium Limited", Supplier 1=Mouser
R206 R207 R208 R209: "USB Pulldown Resistor, 15KOhm", Supplier Part Number 1=541-15KGCT-ND, LatestRevisionDate=29-May-2009, LatestRevisionNote="IPC-7351 Footprint Added.", PackageDescription="Chip Resistor", PackageReference=J1-0603, Published=8-Jun-2000, Publisher="Altium Limited", Supplier 1=Digi-Key
R210: "USB Pullup Resistor, 1.5KOhm", Supplier Part Number 1=667-ERJ-S03D1501V, LatestRevisionDate=29-May-2009, LatestRevisionNote="IPC-7351 Footprint Added.", PackageDescription="Chip Resistor", PackageReference=J1-0603, Published=8-Jun-2000, Publisher="Altium Limited", Supplier 1=Mouser
R300 R302 R303 R304: "RS-422 shockproof resistor, 10 Ohm", Supplier Part Number 1=660-SR732BTTE10R0F, LatestRevisionDate=29-May-2009, LatestRevisionNote="IPC-7351 Footprint Added.", PackageDescription="Chip Resistor", PackageReference=J1-0603, Published=8-Jun-2000, Publisher="Altium Limited", Supplier 1=Mouser
R301 R305: "RS422 Terminating Resistor, 100 Ohm", Supplier Part Number 1=YAG5845CT-ND, LatestRevisionDate=29-May-2009, LatestRevisionNote="IPC-7351 Footprint Added.", PackageDescription="Chip Resistor", PackageReference=J1-0603, Published=8-Jun-2000, Publisher="Altium Limited", Supplier 1=Digi-Key
R400: "470 Ohm Generic Chip Resistor", Supplier Part Number 1=279-CRGP0603F470R, Supplier 1=Mouser
R401 R402: library part CRCW060333R0FKEAC, "33 Ohm Generic Chip Resistor", Supplier Part Number 1=71-CRCW0603-33-E3, Supplier 1=Mouser
U100 U101 U102: library part CMP-0479-00408-1, "Single and Dual Micropower High Side Switch Controller, 1.8 to 5.5 V Vin, 5-pin SOT23 (S5-5), -40 to 85 degC, Pb-Free, Mini Tape and Reel", Manufacturer="Linear Technology", ComponentLink1Description="Manufacturer URL", ComponentLink1URL=http://www.linear.com/, ComponentLink2Description=Datasheet, ComponentLink2URL=http://cds.linear.com/docs/en/datasheet/19812fs.pdf, ComponentLink3Description="Package Specification", ComponentLink3URL=http://cds.linear.com/docs/en/datasheet/17278fb.pdf, Mounting Technology="Surface Mount", PackageDescription="5-Pin Plastic SOT-23, Body 1.625 x 2.90 mm, Pitch 0.95 mm", PackageReference=S5-5, PackageVersion=Aug-07, Packing="Mini Tape and Reel", PartNumber=LTC1981ES5#TRMPBF, RoHS=TRUE
U200: "USB 2.0 Hub IC", Manufacturer="Texas Instruments", Manufacturer_Part_Number=tusb2046b_vf_32, PACKAGE_DESIGNATOR=VF, Supplier Part Number 1=296-48218-1-ND, Datasheet_URL=http://www.ti.com/lit/gpn/TUSB2046B, FAMILY_NAME="USB HUB CONTROLLER", GENERIC_PART_NUMBER=TUSB2046B, INDUSTRY_STD_PKG_TYPE=LQFP, PIN_COUNT=32, RefDes=RefDes, Supplier 1=Digi-Key, Type=Type, Vendor="Texas Instruments"
U201 U202: library part CMP-0326-00072-3, "Universal Serial Bus Port Transient Suppressor, 4 Channels, -40 to +85 degC, 8-pin TSSOP (PW), Green (RoHS & no Sb/Br)", Breakdown Voltage(Min)(V)=7, IO Capacitance(Typ)(pF)=35, IO Leakage Current(nA)=1000, Manufacturer="Texas Instruments", ComponentLink1Description="Manufacturer URL", ComponentLink1URL=http://www.ti.com/, ComponentLink2Description=Datasheet, ComponentLink2URL=http://www.ti.com/general/docs/lit/getliterature.tsp?genericPartNumber=SN65240&fileType=pdf, ComponentLink3Description="URL Link1", ComponentLink3URL=SamplesURL:http://www.ti.com/product/sn65240#samples, DatasheetVersion=SLLS266G, Eco-Plan="Pb-Free (RoHS)", Mounting Technology="Surface Mount", PackageDescription="8-Pin Plastic Thin Small Outline Package 3 x 4.4 mm Body ,0.65 mm Pitch", PackageReference=PW0008A, PackageVersion="revG, Feb-2011", PartNumber=SN65240PWR, SubFamily="ESD Solution", USB Full Speed=TRUE
U300: "RS-422 line driver IC", Supplier Part Number 1=296-40501-1-ND, Supplier 1=Digi-Key
U401: "MCU 32-bit Kinetis K20 ARM Cortex M4 RISC 256KB Flash 1.8V/2.5V/3.3V 64-Pin LQFP Tray", Package="LQFP-64 Freescale Semiconductor", Supplier Part Number 1=841-MK20DX256VLH7, Availability=Unavailable, MF="NXP USA", MP=MK20DX256VLH7, Price=None, SnapEDA_Link=https://www.snapeda.com/parts/MK20DX256VLH7/NXP%20USA%20Inc./view-part/?ref=snap, Supplier 1=Mouser
U402: "Bootloader chip for teensy 3.2", Part Number=MKL04Z32
VR100: "28V to 5V converter", Supplier Part Number 1=1951-3302-ND, Supplier 1=Digi-Key
VR103 VR400: library part CMP-0062-00443-4, "500mA Low Dropout CMOS Linear Regulators Stable with Ceramic Output Capacitors, 3-pin TO-252, Pb-Free, 75 Rail", Manufacturer="Texas Instruments", PackageTopMarking=NSUZXYTT*LP38691*DT-3.3, PowerWise=Y, Code_JEDEC=TO-252-AA, ComponentLink1Description="Datasheet URL", ComponentLink1URL=http://www.ti.com/general/docs/lit/getliterature.tsp?genericPartNumber=LP38691&fileType=pdf, CompType="LDO IC", High-Reliability=Y, PackageDescription="TO252, Molded, Jedec, 6.8 x 6.10 x 2.30mm Body, 3 Lead, 2.28mm Pitch, Surface Mount", PackageReference=NDP0003B, PartNumber=LP38691DT-3.3/NOPB, PinCount=3, RoHS=Y
Y200: "6MHz Crystal Oscillator for TUSB IC.", Supplier Part Number 1=774-ATS060C-E, LatestRevisionDate=17-Jul-2002, LatestRevisionNote="Re-released for DXP Platform.", PackageDescription="Crystal, Thru-Hole; 2 Leads; Body 3.1 x 8.2 mm (Dia.xH)", PackageReference=R38, Published=8-Jun-2000, Publisher="Altium Limited", Supplier 1=Mouser
Y400: "Crystal 16MHz Â±15ppm _Tol_ Â±15ppm _Stability_ 10pF FUND 100Ohm T/R", Package="SMD-4 ECS International", Supplier Part Number 1=520-160-10-37-RWM-T, Digi-Key_Part_Number=XC2119CT-ND, Digi-Key_Purchase_URL=https://www.digikey.com/product-detail/en/ecs-inc/ECS-160-10-37-RWM-TR/XC2119CT-ND/5875603?utm_source=snapeda&utm_medium=aggregator&utm_campaign=symbol, MF="ECS Inc.", MP=ECS-160-10-37-RWM-TR, SnapEDA_Link=https://www.snapeda.com/parts/ECS-160-10-37-RWM-TR/ECS%20Inc./view-part/?ref=snap, Supplier 1=Mouser

## Nets (pads, with @x,y where several pads share a name; then routed paths per layer and width w, separated by ;. In a path a pad name is that pad's centre, name@x,y a point inside that pad or via, vN(x,y) a via of type N, cw(c..) or ccw(c..) an arc to the next point about the centre after c; other vN are vias at no path point)
3V3: C200.2 C201.1 C300.1 R210.2 U200.3 U200.18 U200.22 U200.25 U200.26 U300.4 U300.13 U300.14 VR103.1
+5: C100.2 C101.2 C102.2 P9.5 P9.6 P400.2 U100.5 U101.5 U102.5 VR100.3 VR103.3
+5_USB: C202.1 C203.1 J201.Vcc J202.Vcc
+28: D100.C D101.C D102.C D103.C D104.C D105.C J1.8 P100.1 P100.3 P100.5 P100.7 P100.9 P100.11 P101.1 VR100.1
GND: C200.1 C201.2 C204.2 C205.2 C206.2 C207.2 C208.1 C209.1 C300.2 D300.3 D301.3 J1.11 J200.GND J200.Shield J201.Shield J202.Shield M100.2 M100.5 M101.2 M101.5 M102.2 M102.5 M103.2 P8.1 P8.2 P9.1 P9.2 P101.2 R206.2 R207.2 U200.6 U200.7 U200.8 U200.10 U200.14 U200.19 U200.20 U200.23 U200.24 U200.27 U200.28 U200.31 U201.1 U201.3 U201.5 U201.6 U201.7 U201.8 U300.3 U300.6 U300.7 VR100.2 VR100.5 VR103.4
GND_5V: C100.1 C101.1 C102.1 U100.2 U101.2 U102.2
GND_TN: C400.2 C401.2 C402.2 C403.2 C404.2 C405.2 C406.2 C410.2 FB401.2 J401.5 U401.4 U401.31 U401.47 U402.6 VR400.4 Y400.2 Y400.4 | length 197
  Top Layer w10: C404.2 706.18,3158.29 735.08,3129.39 735.08,3123.28 754.86,3103.5 784.5,3103.5 U401.4 ; U401.47 1323.71,3142 C403.2
GNDUSB: C202.2 C203.2 J201.GND J202.GND R208.1 R209.1 U202.1 U202.3 U202.5 U202.7
NetC204_1: C204.1 R201.2 U200.2
NetC205_1: C205.1 R200.2 R210.1 U200.1
NetC206_1: C206.1 R203.1 R207.1 U200.12 U202.8
NetC207_1: C207.1 R202.1 R206.1 U200.11 U202.6
NetC208_2: C208.2 R204.1 R208.2 U200.15 U202.2
NetC209_2: C209.2 R205.1 R209.2 U200.16 U202.4
NetC400_1: C400.1 C406.1 J401.1 P400.1 VR400.3
NetC401_1: C401.1 C402.1 C403.1 C404.1 C405.1 D400.A FB400.1 U401.3 U401.7 U401.30 U401.48 VR400.1 | length 589.1
  Top Layer w10: FB400.1 601.18,2919.71 635.67,2954.19 649.06,2954.19 671.42,2976.55 671.42,2991.13 679.29,2999 C405.1 737.83,2999 744.85,3006.01 744.85,3032.49 751.86,3039.5 757,3039.5 761.5,3044 U401.7 ; C404.1 706.18,3219.71 736.28,3189.61 806.03,3189.61 824,3171.64 824,3132.36 818.14,3126.5 788,3126.5 U401.3@785,3123.5 ; U401.48 1281.11,3162 1323.82,3204.71 C403.1
NetC407_1: C407.1 FB400.2 R1.2 R2.2 R3.2 R4.2 R5.2 R6.2 R7.2 R8.2 R9.2 R400.2 U401.13 | length 17.1
  Top Layer w10: R400.2@698.82,2914.71 R400.2 R400.2@711.29,2926
NetC407_2: C407.2 C408.2 C409.1 FB401.1 P2.2 P2.4 P2.6 P2.8 P2.10 P2.12 P2.14 P2.16 P2.18 U401.15 U401.16
NetC408_1: C408.1 R400.1 U401.14 | length 0.7
  Top Layer w10: U401.14@784.5,2905.5 U401.14
NetC409_2: C409.2 U401.17 | length 87.1
  Top Layer w10: C409.2 820.71,2720.18 861.5,2760.97 861.5,2788.5 U401.17
NetC410_1: C410.1 D400.C U401.21 U402.3 | length 0
NetD100_2: D100.A M100.1 P100.2
NetD101_2: D101.A M100.4 P100.4
NetD102_2: D102.A M101.1 P100.6
NetD103_2: D103.A M101.4 P100.8
NetD104_2: D104.A M102.1 P100.10
NetD105_2: D105.A M102.4 P100.12
NetJ1_1: J1.1 P9.19
NetJ1_4: J1.4 P9.20
NetJ1_13: J1.13 P9.11
NetJ1_14: J1.14 P9.13
NetJ1_15: J1.15 P8.10
NetJ1_16: J1.16 P8.12
NetJ1_17: J1.17 P8.14
NetJ1_20: J1.20 U401.59
NetJ1_21: J1.21 U401.60
NetJ1_22: J1.22 U401.2
NetJ1_23: J1.23 U401.54
NetJ1_24: J1.24 U401.53
NetJ400_1: J400.1 U402.18
NetJ401_4: J401.4 U401.23 U402.10
NetJ402_1: J402.1 U401.34 U402.8 U402.25
NetM100_3: M100.3 M100.6 R100.2
NetM101_3: M101.3 M101.6 R101.2
NetM102_3: M102.3 M102.6 R102.2
NetM103_1: M103.1 P9.42
NetM103_3: M103.3 P101.3
NetP1_1: P1.1 P9.24
NetP1_2: P1.2 U300.5
NetP1_3: P1.3 P9.26
NetP1_4: P1.4 U300.2
NetP2_1: P2.1 R1.1 U401.58
NetP2_3: P2.3 R2.1 U401.43
NetP2_5: P2.5 R3.1 U401.35
NetP2_7: P2.7 R4.1 U401.36
NetP2_9: P2.9 R5.1 U401.38
NetP2_11: P2.11 R6.1 U401.37
NetP2_13: P2.13 R7.1 U401.62
NetP2_15: P2.15 R8.1 U401.63
NetP2_17: P2.17 R9.1 U401.44
NetP9_10: P9.10
NetP9_12: P9.12 U200.4
NetP9_21: P9.21 U401.39
NetP9_22: P9.22 U401.40
NetR100_1: R100.1 U100.4
NetR101_1: R101.1 U101.4
NetR102_1: R102.1 U102.4
NetR300_1: R300.1 U300.12
NetR302_1: R302.1 U300.11
NetR303_1: R303.1 U300.10
NetR304_1: R304.1 U300.9
NetR401_1: R401.1 U401.5
NetR402_1: R402.1 U401.6
NetU100_3: U100.3 U401.64
NetU101_3: U101.3 U401.61
NetU102_3: U102.3 U401.46
NetU200_29: U200.29 Y200.2
NetU200_30: U200.30 Y200.1
NetU401_22: U401.22 U402.16
NetU401_24: U401.24 U402.17
NetU401_25: U401.25 U402.15
NetU401_32: U401.32 Y400.1 | length 133.8
  Top Layer w10: U401.32 1158,2765.5 1158.5,2765 1162.46,2765 1217.55,2709.91 1219.88,2709.91 1236.46,2693.33 Y400.1
NetU401_33: U401.33 Y400.3 | length 168.5
  Top Layer w10: U401.33 1258.5,2866 1291.57,2832.93 Y400.3
RS422-Rx_N: D300.1 J1.3 R301.2 R302.2
RS422-Rx_P: D300.2 J1.2 R300.2 R301.1
RS422-Tx_N: D301.2 J1.5 R303.2 R305.2
RS422-Tx_P: D301.1 J1.6 R304.2 R305.1
TEENSY_USB_N: J401.2 R402.2
TEENSY_USB_P: J401.3 R401.2
USB_0_N: J200.D- R201.1 U201.4
USB_0_P: J200.D+ R200.1 U201.2
USB_1_N: J201.D- R202.2
USB_1_P: J201.D+ R203.2
USB_2_N: J202.D- R204.2
USB_2_P: J202.D+ R205.2
pads on no net: J1.7 J1.9 J1.10 J1.12 J1.18 J1.19 J1.25 J200.Vcc J401.shield P8.3 P8.4 P8.5 P8.6 P8.7 P8.8 P8.9 P8.11 P8.13 P8.15 P8.16 P8.17 P8.18 P8.19 P8.20 P8.21 P8.22 P8.23 P8.24 P8.25 P8.26 P8.27 P8.28 P8.29 P8.30 P8.31 P8.32 P8.33 P8.34 P8.35 P8.36 P8.37 P8.38 P8.39 P8.40 P8.41 P8.42 P8.43 P8.44 P8.45 P8.46 P9.3 P9.4 P9.7 P9.8 P9.9 P9.14 P9.15 P9.16 P9.17 P9.18 P9.23 P9.25 P9.27 P9.28 P9.29 P9.30 P9.31 P9.32 P9.33 P9.34 P9.35 P9.36 P9.37 P9.38 P9.39 P9.40 P9.41 P9.43 P9.44 P9.45 P9.46 U100.1 U101.1 U102.1 U200.5 U200.9 U200.13 U200.17 U200.21 U200.32 U300.1 U300.8 U401.1 U401.8 U401.9 U401.10 U401.11 U401.12 U401.18 U401.19 U401.20 U401.26 U401.27 U401.28 U401.29 U401.41 U401.42 U401.45 U401.49 U401.50 U401.51 U401.52 U401.55 U401.56 U401.57 U402.1 U402.2 U402.4 U402.5 U402.7 U402.9 U402.11 U402.12 U402.13 U402.14 U402.19 U402.20 U402.21 U402.22 U402.23 U402.24 U402.26 U402.27 U402.28 U402.29 U402.30 U402.31 U402.32 VR100.4 VR100.6

## Polygon pours and split planes (outlines as drawn)
no net on Board (solid): 3195,620
no net on Int1 (GND) "NONET_L02_P005" (solid, pour order 5): 1270,860
no net on Int1 (GND) "NONET_L02_P002" (solid, pour order 2): 2610,1455

## Other copper
Top Layer:
  region: 120,2580

## Silkscreen, mask and mechanical layers (free items; w line width, h text height)
Top Overlay:
  text "Remove when / programming" at 1760,4430 h30 r270
Board:
  circle w10: c4055,3785 r62.5
  circle w10: c4060,2308.5 r62.5
  circle w10: c1255,435 r62.5
  circle w10: c215,3785 r62.5
  circle w10: c4635,2395 r62.5
  circle w10: c4635,3785 r62.5
  circle w10: c2425,3785 r62.5
  circle w10: c215,2395 r62.5
  circle w10: c215,105 r62.5
  circle w10: c2425,1410 r62.5
  circle w10: c3860,105 r62.5
  circle w10: c2425,105 r62.5
  circle w10: c1255,2335 r62.5
  circle w10: c3855,2210 r62.5
  circle w10: c3855,560 r62.5
  pour cut-out: 4572.5,2395 ccw(c4635,2395) 4635,2332.5 ccw(c4635,2395) 4697.5,2395 ccw(c4635,2395) 4635,2457.5 ccw(c4635,2395)
  lines w10: 2649.97,3900 105,3900 105,1635 1480,1635 1480,935 0,935 0,0 4735,0 4735,3900 4735,5440 2640,5440 2650,3900.03
Dimensions:
  lines w10: 2425,105 2425,3785 ; 3860,105 215,105 215,3785 4635,3785 4635,2395 ; 8365,3890 8375,3890

## Dimensions
2640,5440 to 4735,5440 on Dimensions
2640,5440 to 2649.97,3900 on Dimensions
4055,3847.5 to 4635,3847.5 on Board
4122.5,2308.5 to 4117.5,3785 on Board
4635,2395 to 4965,2225 on Dimensions
2425,1472.5 to 1480,1635 on Dimensions
105,1635 to 1480,935 on Dimensions
2487.5,1410 to 2487.5,105 on Dimensions
215,105 to 0,0 on Board
215,105 to 0,0 on Board
4635,3785 to 4635,2395 on Dimensions
2461.94,3865 to 4671.94,3865 on Dimensions
215,105 to 2425,105 on Dimensions
2425,105 to 3860,105 on Dimensions
215,3785 to 215,2395 on Dimensions
215,105 to 215,2395 on Dimensions
0,0 to 4735,0 on Board
0,0 to 4735,0 on Board
0,935 to 105,1635 on Board

## Text inside footprints (layer, text, board x,y; h text height)
P1: Top Overlay "1" at 2685,1925 h50 r90; Top Overlay "2" at 2585,1910 h50 r90; Top Overlay "4" at 2590,2180 h50 r90; Top Overlay "3" at 2690,2180 h50 r90
P2: Top Overlay "18" at 1535,3810 h50; Top Overlay "17" at 1530,3710 h50; Top Overlay "1" at 555,3710 h50; Top Overlay "2" at 545,3815 h50
P100: Bottom Overlay "12" at 3191.06,2761.93 h50 r90; Bottom Overlay "1" at 3291.06,2721.93 h50 r90; Bottom Overlay "1" at 3291.06,2761.93 h50 r90; Bottom Overlay "1" at 3291.06,3441.93 h50 r90; Bottom Overlay "2" at 3191.06,3443.94 h50 r90